# Altium PCB Labortápegység_v1.PcbDoc
Units mil, origin at the board's own origin, x right, y up, seen from the top; angles counter-clockwise.
Board outline 1968.5 x 1968.5 mil, 2 copper layers (Top Layer, Bottom Layer); 60 components, 36 nets, 167 pads, 21 vias.
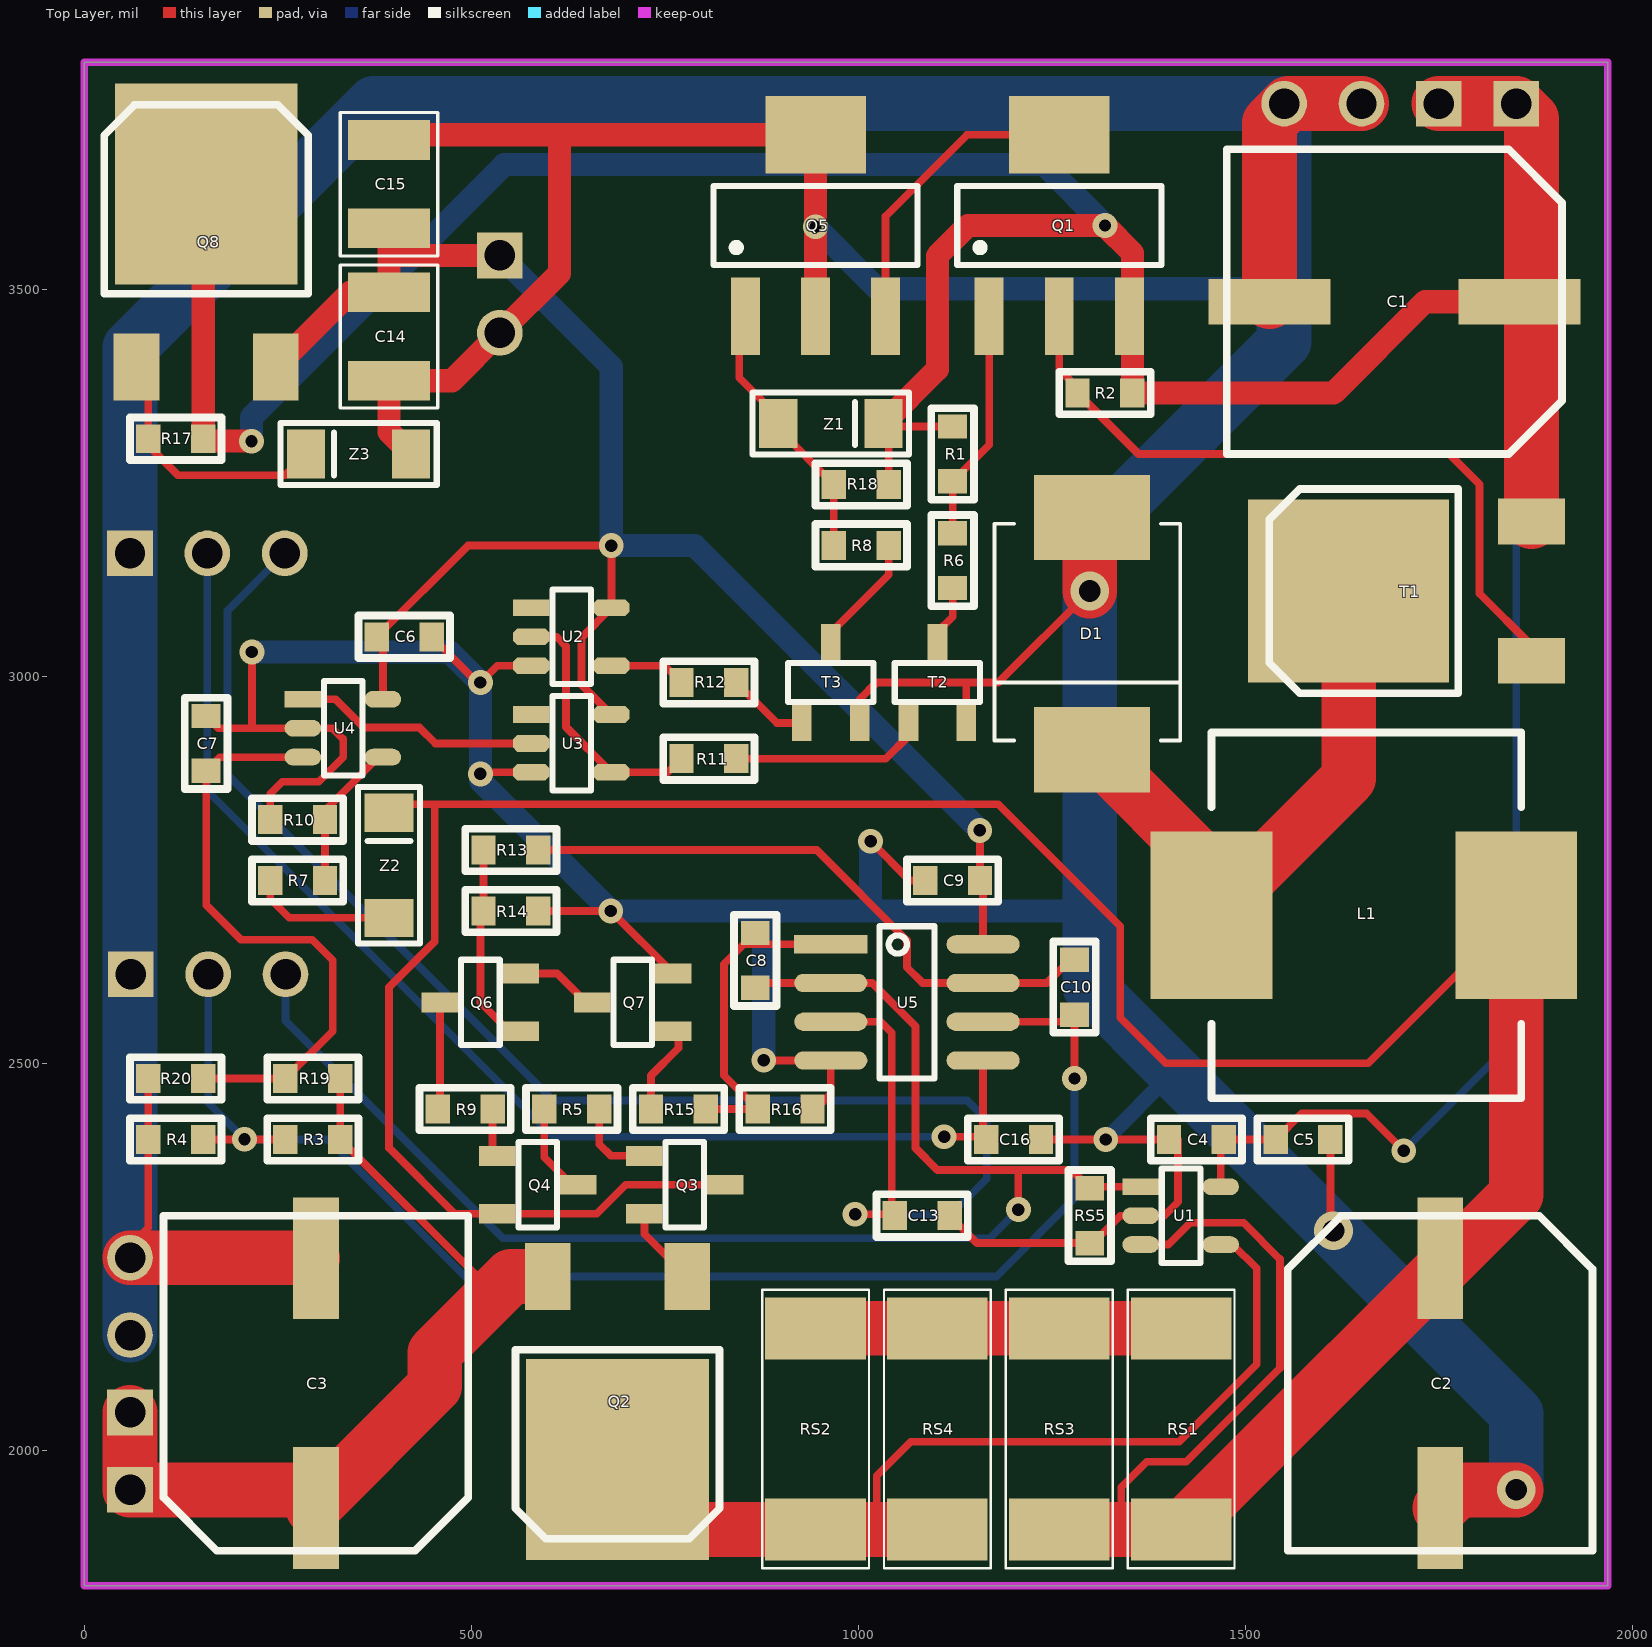
[diagram p0: Top Layer view]
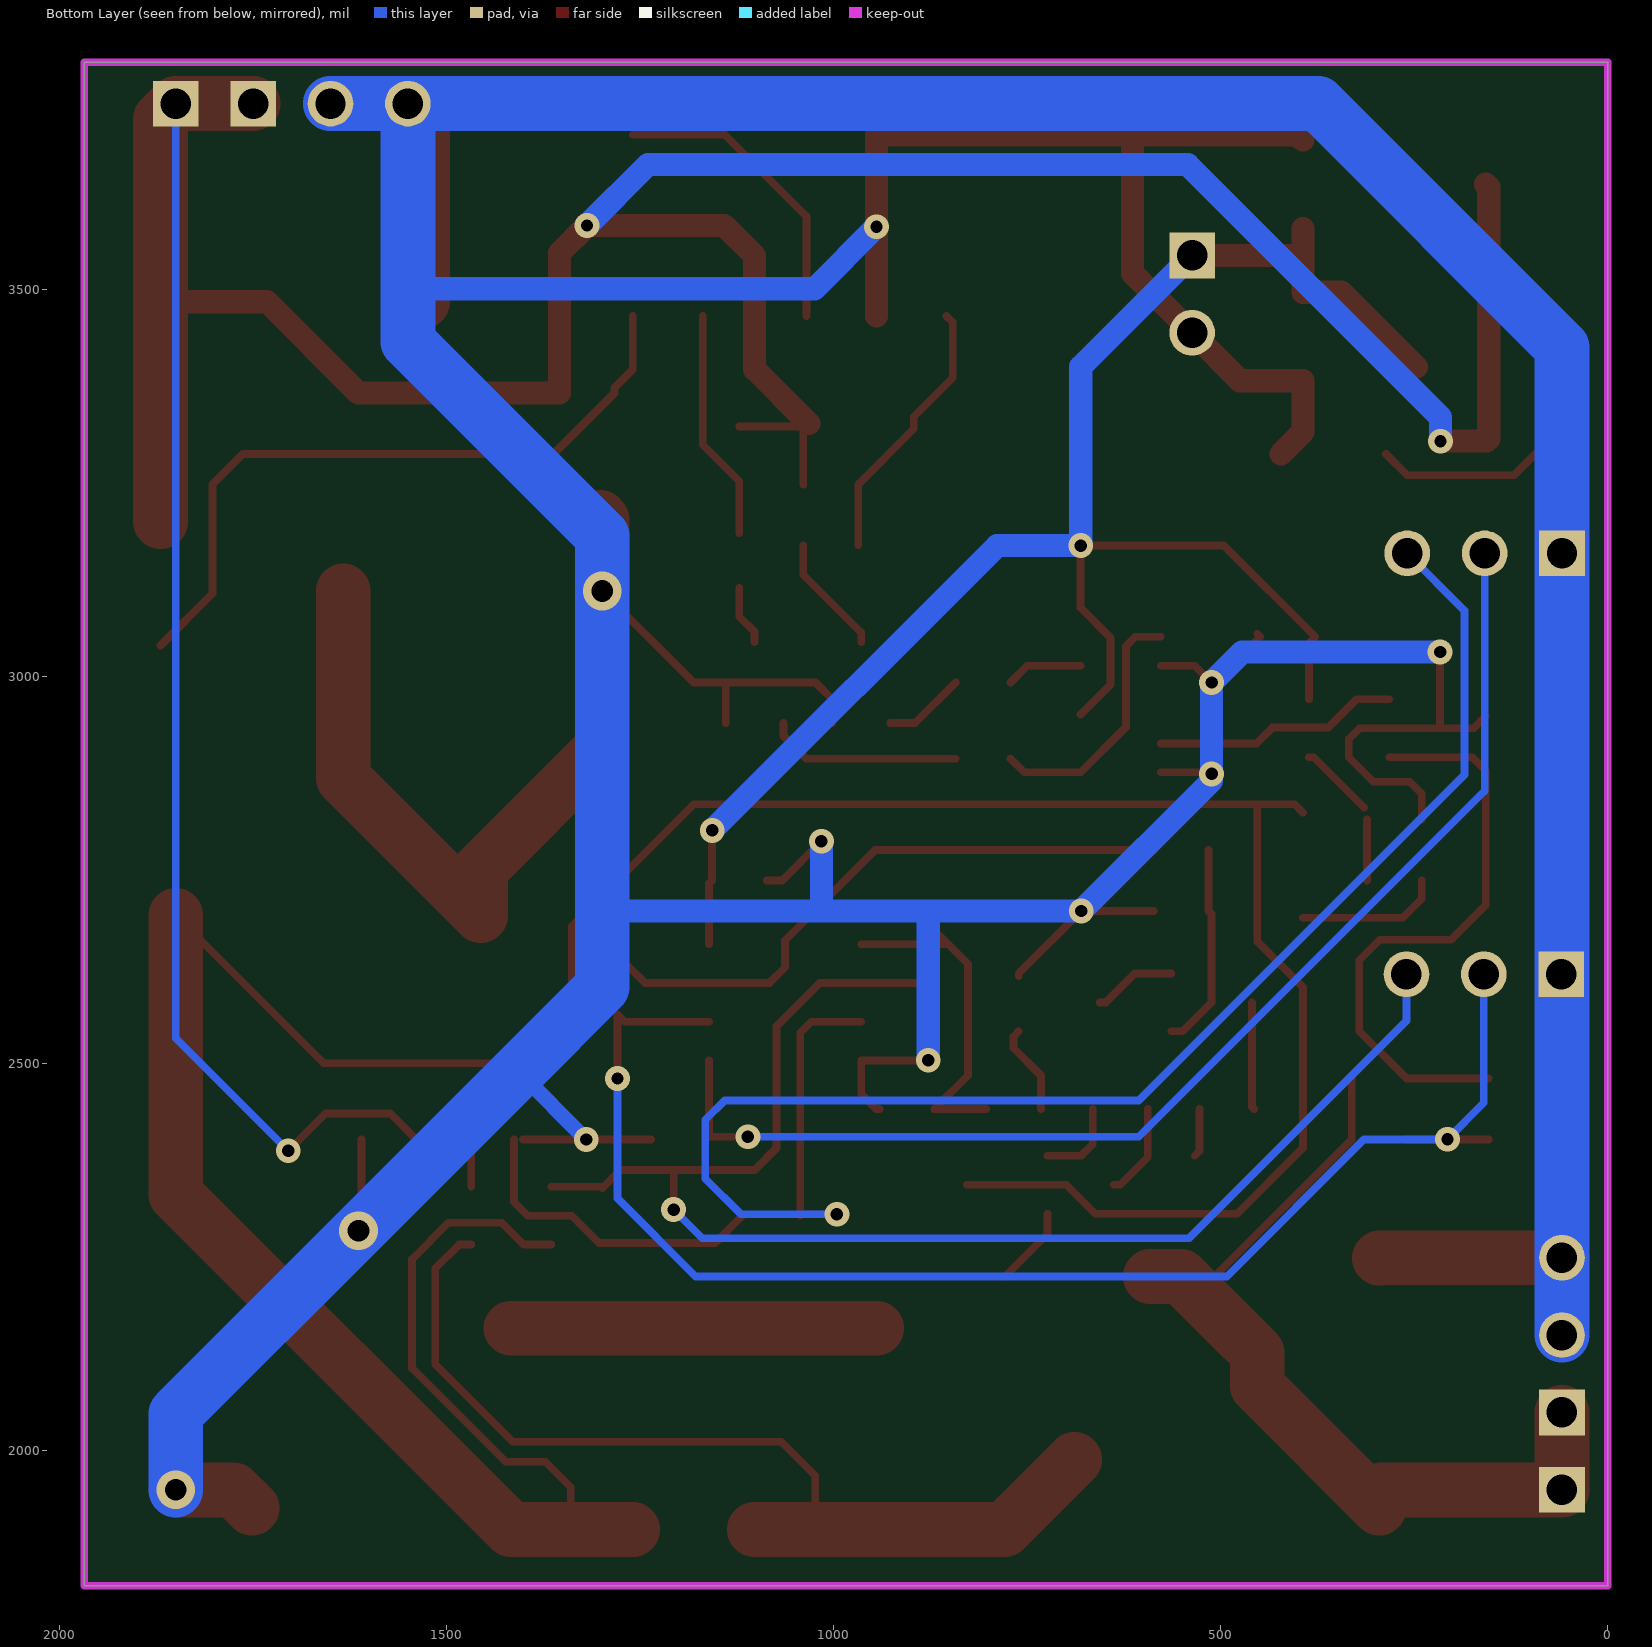
[diagram p1: Bottom Layer view, seen from below]
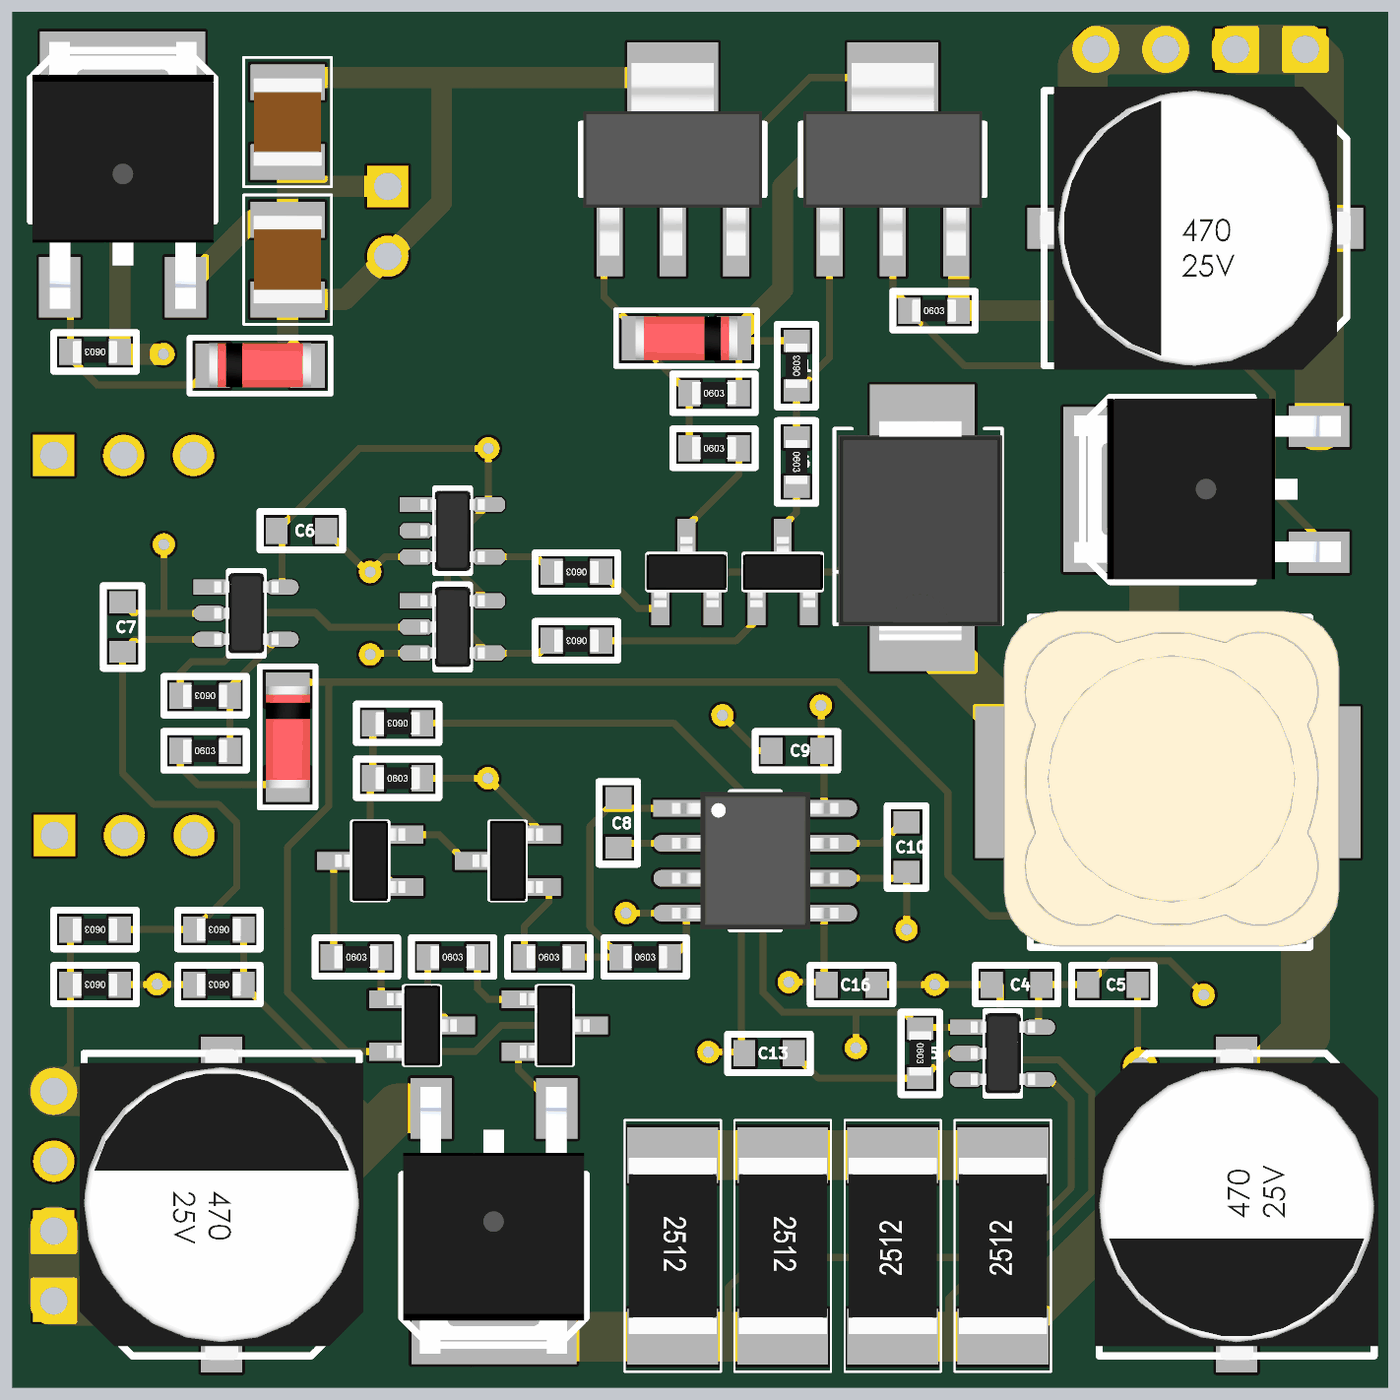
[diagram p2: 3D render of the assembled board from above, using the file's embedded part models]

## Layer stack, top to bottom
Top Layer: signal copper 1.4
Dielectric: dielectric 12.6, FR-4, Dk 4.8
Bottom Layer: signal copper 1.4

## Board outline
0,1825 1968.5,1825 1968.5,3793.5 0,3793.5

## Design rules (kind name [scope] priority, off if disabled: settings)
Clearance [All] p1: gap=10
PolygonConnect [All] p1: connectstyle=Relief reliefconductorwidth=10 reliefentries=4 polygonreliefangle="90 Angle"
RoutingVias [All] p1: holewidth=28 width=50 viastyle="Through Hole" minholewidth=16 minwidth=32 maxholewidth=28 maxwidth=50
SilkToSilkClearance [All] p1: silktosilkclearance=0
SilkscreenOverComponentPads [All] p1: minsilkscreentomaskgap=0
SolderMaskExpansion [All] p1: expansion=4
Width [All] p1: maxlimit=196.85 minlimit=10 preferedwidth=10
26 further rules are at their usual default settings.

## Components (designator, comment, footprint, x,y, rotation, side; value= is the part's Value field where it differs from the comment)
C1 "220uF 50V" CAP_ALU_ELKO_10D_10,5H 1692.91,3484.25 r180 top
C2 "220uF 50V" CAP_ALU_ELKO_10D_10,5H 1751.97,2086.61 r270 top
C3 "220uF 50V" CAP_ALU_ELKO_10D_10,5H 299.28,2086.61 r90 top
C4 "100nF" FP_0603_CAP_080 1437.01,2401.57 r0 top
C5 "1uF" FP_0603_CAP_080 1574.8,2401.57 r0 top
C6 "100nF" FP_0603_CAP_080 413.39,3051.18 r180 top
C7 "100nF" FP_0603_CAP_080 157.48,2913.39 r270 top
C8 "100nF" FP_0603_CAP_080 867,2633 r270 top
C9 "100nF" FP_0603_CAP_080 1122.05,2736.22 r0 top
C10 "470nF" FP_0603_CAP_080 1279.53,2598.43 r270 top
C13 "100nF" FP_0603_CAP_080 1082.68,2303.15 r180 top
C14 "22uF" FP_1210_CAP_N 393.7,3439.17 r90 top
C15 "22uF" FP_1210_CAP_N 393.7,3636.02 r270 top
C16 "100nF" FP_0603_CAP_080 1200.79,2401.57 r180 top
D1 "SS36" DIODE_SMC 1299.21,3051.18 r270 top
L1 "22uH" SRR1206_T 1653.54,2691.14 r0 top
Q1 "BCP53-16" TR_SOT223 1259.84,3582.68 r90 top
Q2 "MJD122G" TR_D-PAK 688.98,2106.3 r180 top
Q3 "MMBTA42LT1G" TR_SOT23 776,2343 r180 top
Q4 "MMBTA92LT1G" TR_SOT23 586,2343 r180 top
Q5 "BCP53-16" TR_SOT223 944.88,3582.68 r90 top
Q6 "MMBTA42LT1G" TR_SOT23 511.81,2578.74 r0 top
Q7 "MMBTA42LT1G" TR_SOT23 708.66,2578.74 r0 top
Q8 "MJD122G" TR_D-PAK 157.48,3517.91 r0 top
R1 "1K" FP_0603_RES 1122.05,3287.4 r90 top
R2 "1K" FP_0603_RES 1318.9,3366.14 r0 top
R3 "1K" FP_0603_RES 295.28,2401.57 r180 top
R4 "1K" FP_0603_RES 118.11,2401.57 r180 top
R5 "1K" FP_0603_RES 629.92,2440.94 r0 top
R6 "1K" FP_0603_RES 1122.05,3149.61 r270 top
R7 "1K" FP_0603_RES 275.59,2736.22 r0 top
R8 "1K" FP_0603_RES 1003.94,3169.29 r0 top
R9 "1K" FP_0603_RES 492.13,2440.94 r0 top
R10 "1K" FP_0603_RES 275.59,2814.96 r180 top
R11 "1K" FP_0603_RES 807.09,2893.7 r180 top
R12 "1K" FP_0603_RES 807.09,2992.13 r180 top
R13 "1K" FP_0603_RES 551.18,2775.59 r180 top
R14 "1K" FP_0603_RES 551.18,2696.85 r0 top
R15 "1K" FP_0603_RES 767.72,2440.94 r0 top
R16 "1K" FP_0603_RES 905.51,2440.94 r0 top
R17 "100K" FP_0603_RES 118.11,3307.09 r180 top
R18 "1K" FP_0603_RES 1003.94,3248.03 r0 top
R19 "1K" FP_0603_RES 295.28,2480.32 r180 top
R20 "1K" FP_0603_RES 118.11,2480.32 r180 top
RS1 "0.2R" FP_2512_RES 1417.32,2027.56 r90 top
RS2 "0.2R" FP_2512_RES 944.88,2027.56 r270 top
RS3 "0.2R" FP_2512_RES 1259.84,2027.56 r90 top
RS4 "0.2R" FP_2512_RES 1102.36,2027.56 r270 top
RS5 "20K" FP_0603_RES 1299.21,2303.15 r270 top
T1 "NTD20P06LG" FET_D-PAK 1751.97,3110.24 r90 top
T2 "PMBF170" FET_SOT23 1102.36,2992.13 r270 top
T3 "PMBF170" FET_SOT23 964.57,2992.13 r270 top
U1 "INA168" ANALOG_SOT23-5 1417.32,2303.15 r0 top
U2 "74AHC1G14" GATE_SOT23-5 629.92,3051.18 r0 top
U3 "74AHC1G14" GATE_SOT23-5 629.92,2913.39 r0 top
U4 "MCP6001T" ANALOG_SOT23-5 334.65,2933.07 r0 top
U5 "LM358" FP_SO8_MS012AA 1062.99,2578.74 r0 top
Z1 "18V" SOD-80 964.57,3326.77 r270 top
Z2 "3.6V" SOD-80 393.7,2755.91 r0 top
Z3 "5V1" SOD-80 354.33,3287.4 r90 top

## Footprints (in the part's own frame and the unit in brackets; to place one, negate y for a bottom-side part, rotate by r counter-clockwise, add the part's x,y. Pads: shape width x height; smd on the part's side, far side on the other; paste and mask are expansions set on the pad)
ANALOG_SOT23-5 [mm] "SOT23, 5-Leads, Body 2.9x1.6mm, Pitch 0.95mm, Lead Span 2.8mm, IPC Medium Density"
  rect 1.2x0.55 smd mask+0.05: 1(-1.327,0.95)
  oval 1.2x0.55 smd mask+0.05: 2(-1.327,0) 3(-1.327,-0.95) 4(1.3,-0.95) 5(1.3,0.95)
  silkscreen extent -0.64,-1.55 0.64,1.55, body extent -1.17,-1.46 1.17,1.46, height 1
CAP_ALU_ELKO_10D_10,5H [mm]
  rect 4x1.5 smd: N(4.1,0) P(-4.1,0)
  silkscreen extent -5.5,-5 5.5,5, body extent -5.65,-5.15 5.65,5.15, height 10.8
DIODE_SMC [mil]
  rect 110x150 smd: A(-154,3) K(146,3)
  silkscreen extent -146,-123 134,117, body extent -157,-117 157,117, height 91
FET_D-PAK [mm] "D-Pak (TO-252-AA)"
  rect 6x6.6 smd: D(0,3)
  rect 1.5x2.2 smd: G(-2.286,-3) S(2.286,-3)
  silkscreen extent -3.35,-0.6 3.35,5.6, body extent -3.28,-3.79 3.3,5.91, height 2.32
FET_SOT23 [mm] "SOT23-3 tok"
  rect 1.2x0.65 smd: D(-1.327,0) G(1.327,-0.95) S(1.327,0.95)
  silkscreen extent -0.64,-1.4 0.64,1.4, body extent -1.27,-1.46 1.27,1.46, height 0.97
FP_0603_CAP_080 [mm] "0.8mm magas 0603 kapacitás"
  rect 0.8x0.95 smd: 1(-0.9,0) 2(0.9,0)
  silkscreen extent -1.5,-0.7 1.5,0.7, body extent -0.8,-0.4 0.76,0.4, height 0.8
FP_0603_RES [mm] "0603 ellenállás"
  rect 0.8x0.95 smd: 1(-0.9,0) 2(0.9,0)
  silkscreen extent -1.5,-0.7 1.5,0.7, body extent -0.8,-0.4 0.8,0.4, height 0.44
FP_1210_CAP_N [mm] "Chip Capacitor, Body 3.2x2.5mm, IPC Medium Density"
  rect 1.3x2.7 smd: 1(-1.45,0) 2(1.45,0)
  silkscreen extent -2.35,-1.6 2.35,1.6, body extent -1.6,-1.25 1.6,1.25, height 2.5
FP_2512_RES [mm]
  rect 2.035x3.305 smd: 1(-3.302,0) 2(3.302,0)
  silkscreen extent -4.57,-1.75 4.57,1.75, body extent -3.2,-1.6 3.2,1.6, height 0.6
FP_SO8_MS012AA [mm] "SO8 JEDEC MS-012AA, Analog Devices R-8, SO8-SOT96-1, NS M08A"
  rect 2.4x0.6 smd: 1(-2.5,1.905)
  oval 2.4x0.6 smd: 2(-2.5,0.635) 3(-2.5,-0.635) 4(-2.5,-1.905) 5(2.5,-1.905) 6(2.5,-0.635) 7(2.5,0.635) 8(2.5,1.905)
  silkscreen extent -0.9,-2.5 0.9,2.5, body extent -3.03,-2.5 3.03,2.5, height 1.9
GATE_SOT23-5 [mm] "SOT23, 5-Leads, Body 2.9x1.6mm, Pitch 0.95mm, Lead Span 2.8mm, IPC Medium Density"
  rect 1.2x0.55 smd mask+0.05: 1(-1.327,0.95)
  oct 1.2x0.55 smd mask+0.05: 2(-1.327,0) 3(-1.327,-0.95) 4(1.3,-0.95) 5(1.3,0.95)
  silkscreen extent -0.64,-1.55 0.64,1.55, body extent -1.17,-1.46 1.17,1.46, height 1
SOD-80 [mm]
  rect 1.6x1.25 smd: A(0,-1.725) K(0,1.725)
  silkscreen extent -1.02,-2.57 1.02,2.57, body extent -0.79,-1.85 0.81,1.85, height 1.61
SRR1206_T [mm] "POWER INDUCTOR"
  rect 4x5.5 smd: 1(-5,0) 2(5,0)
  silkscreen extent -5,-6 5.16,6, body extent -5.97,-5.97 6.23,6.23, height 6
TR_D-PAK [mm] "D-Pak (TO-252-AA)"
  rect 1.5x2.2 smd: B(-2.286,-3) E(2.286,-3)
  rect 6x6.6 smd: C(0,3)
  silkscreen extent -3.35,-0.6 3.35,5.6, body extent -3.28,-3.79 3.3,5.91, height 2.32
TR_SOT23 [mm] "SOT23-3 tok"
  rect 1.2x0.65 smd: B(1.327,-0.95) C(-1.327,0) E(1.327,0.95)
  silkscreen extent -0.64,-1.4 0.64,1.4, body extent -1.27,-1.46 1.27,1.46, height 0.97
TR_SOT223 [mm] "SOT223 package, 3 leads"
  rect 2.55x0.95 smd: B(-2.975,2.3) C(-2.975,0) E(-2.975,-2.3)
  rect 2.55x3.3 smd: C(2.975,0)
  silkscreen extent -1.3,-3.35 1.3,3.35, body extent -3.5,-3.25 3.5,3.25, height 1.65

## Part data
C1 C2 C3: library part "Cap Pol1", "Polarized Capacitor (Radial)"
C4 C6 C7 C8 C9 C10 C13 C16: library part Cap, "Capacitor"
C5 C14 C15: library part CAP, "Capacitor"
D1: library part SCHOTTKY, "NXP - PMEG3020EJ,115 - SCHOTTKY RECT 30V 2A SOD323F"
L1: library part Inductor, "Inductor"
Q1 Q4 Q5: library part PNP, "PNP General-purpose Transistor"
Q2 Q3 Q6 Q7 Q8: library part NPN, "NPN General-purpose Transistor"
R1 R2 R3 R4 R5 R6 R7 R8 R9 R10 R11 R12 R13 R14 R15 R16 R18 R19 R20: library part RES, "Resistor"
R17 RS1 RS2 RS3 RS4 RS5: library part Res3, "Resistor"
T1: library part PMOS
T2 T3: library part NMOS
U2 U3: "SCHMITT-TRIGGER INVERTER"
U4: library part MCP6001
U5: "Low power dual operational amplifiers"
Z1 Z2 Z3: library part ZENER, "Zener Diode"

## Free pads (board coordinates)
  rect 59.06x59.06 hole 39.37: 0(59,3159) 0(59.06,1948.82) 0(59.06,2048.82) 0(60,2615) 0(537,3544) 0(1750.39,3740.16) 0(1850.39,3740.16)
  round 59.06 hole 39.37: 0(59.06,2148.82) 0(59.06,2248.82) 0(159,3159) 0(160,2615) 0(259,3159) 0(260,2615) 0(537,3444) 0(1550.39,3740.16) 0(1650.39,3740.16)

## Via types
v1: diameter 32, hole 16, Top Layer to Bottom Layer, 18 vias
v2: diameter 50, hole 28, Top Layer to Bottom Layer, 3 vias

## Nets (pads, with @x,y where several pads share a name; then routed paths per layer and width w, separated by ;. In a path a pad name is that pad's centre, name@x,y a point inside that pad or via, vN(x,y) a via of type N, cw(c..) or ccw(c..) an arc to the next point about the centre after c; other vN are vias at no path point)
5V1: C6.2 C9.2 C14.2 C15.2 pad.0@537,3544 Q8.E U2.5 U3.5 U4.5 U5.8 | length 2312.7
  Top Layer w10: U4.5 385.83,3043.31 C6.2 495.77,3169 v1(681,3169) ; U3.5 642.48,2989.41 642.48,3049.96 U2.5 v1@681.1,3168.9 ; v1(1157,2801) 1157.48,2800.52 C9.2 1161.42,2732.28 U5.8
  Top Layer w30: Q8.E 343.94,3496.26 C14.2 393.7,3550 ; C15.2 393.7,3550 ; pad.0@537,3544 399.7,3544 393.7,3550
  Bottom Layer w30: pad.0@537,3544 681,3400 v1(681,3169) 789,3169 v1(1157,2801)
CURRENT_0-3V: C13.2 pad.0@259,3159 U5.3 | length 2116.4
  Top Layer w10: U5.3 1028.94,2553.74 1043.31,2539.37 1043.31,2303.15 1041.46,2305 v1(996,2305)
  Bottom Layer w10: pad.0@259,3159 185,3085 185,2873 606,2452 1141,2452 1166,2427 1166,2351 1120,2305 v1(996,2305)
GND: C1.N C2.N C3.N C4.1 C5.2 C6.1 C7.1 C9.1 C13.1 C14.1 C15.1 C16.1 D1.A pad.0@59,3159 pad.0@59.06,2148.82 pad.0@59.06,2248.82 pad.0@60,2615 pad.0@537,3444 pad.0@1550.39,3740.16 pad.0@1650.39,3740.16 Q5.C Q7.E R4.2 R10.2 R14.2 R16.2 R20.2 RS5.2 T2.S T3.S U1.2 U2.3 U3.3 U4.2 U5.4 Z3.A | length 12170.8
  Top Layer w10: pad.0@41.14,2262.01 39.37,2263.78 59.06,2263.78 82.68,2287.4 R4.2 R20.2 ; C7.1 173.23,2933.07 216.54,2933.07 ; v1(216.54,3031.5) 216.54,2933.07 ; R10.2 240.16,2848.16 256,2864 303,2864 334.65,2895.65 334.65,2919 320.57,2933.07 U4.2 216.54,2933.07 ; C6.1@452.76,3055.12 C6.1 507.87,2992.13 v1(511.81,2992.13) 533.46,3013.78 U2.3 ; v1(511.81,2874.02) 513.78,2875.98 U3.3 ; R14.2 v1(680.2,2696.85) Q7.E Q7.E@760.91,2612.57 ; v1(878,2504) 878,2509 883.26,2503.74 U5.4 964.57,2460.53 944.98,2440.94 R16.2 ; T3.S 1001.97,2970.47 1023.62,2992.13 1181.1,2992.13 v2(1299.21,3110.24) ; v1(1016,2787) 1066.78,2736.22 C9.1 ; C13.1 1153.54,2267.72 RS5.2 1303.15,2267.72 1338.58,2303.15 U1.2 1395.54,2303.15 1413.39,2321 C4.1@1413.39,2401.57 ; T2.S 1139.76,2988 ; C16.1 v1(1320,2401.57) C4.1 ; C5.2 1610.24,2287.4 v2(1614.17,2283.46)
  Top Layer w30: C15.1 400.39,3699.8 614,3699.8 ; Z3.A 393.7,3315.94 C14.1 475.09,3382.09 537,3444 614,3521 614,3699.8 ; Q5.C@944.88,3465.55 v1(944.88,3581) 944.88,3699.8 614,3699.8
  Top Layer w70.87: pad.0@59.06,2248.82 294.49,2248.82 C3.N@295.28,2248.03 ; v2(1299.21,3110.24) 1299.21,3202.18 D1.A ; C1.N 1531.5,3715.5 1556.16,3740.16 pad.0@1650.39,3740.16 ; C2.N 1775.59,1948.82 v2(1850.39,1948.82)
  Bottom Layer w10: 1020.5,2700.35 1024,2696.85 ; 1274,2696.85 1292.36,2696.85 1299.21,2690
  Bottom Layer w20: v1(1320,2401.57) 1406.32,2487.89 1406.32,2491.32
  Bottom Layer w30: v1(216.54,3031.5) 472.44,3031.5 v1(511.81,2992.13) v1(511.81,2874.02) 511.81,2865.24 v1(680.2,2696.85) 884,2696.85 ; v1(878,2504) 878,2690.85 884,2696.85 ; v1(944.88,3581) 1024.88,3501 1550.39,3501 ; v1(1016,2787) 1016,2704.85 1020.5,2700.35 ; 1274,2696.85 1024,2696.85 884,2696.85
  Bottom Layer w70.87: pad.0@59.06,2148.82 59.06,2248.82 59.06,3425.2 374.02,3740.16 pad.0@1550.39,3740.16 ; pad.0@1650.39,3740.16 pad.0@1550.39,3740.16 ; v2(1850.39,1948.82) 1850.39,2047.24 v2(1614.17,2283.46) 1406.32,2491.32 1299.21,2598.43 1299.21,2690 v2(1299.21,3110.24) 1299.21,3181.21 1550.39,3432.39 1550.39,3501 pad.0@1550.39,3740.16
I_MEASURE: C8.2 pad.0@260,2615 RS5.1 U1.1 U5.2 | length 1891.8
  Top Layer w10: C8.2@867.52,2603.74 U5.2 1018.31,2603.74 1074,2548.05 1074,2390.57 1102.36,2362.2 1207,2362.2 ; v1(1207,2311) 1206,2311 1207,2312 1207,2362.2 ; U1.1 1301.18,2340.55 RS5.1 1275.59,2362.2 1207,2362.2
  Bottom Layer w10: pad.0@260,2615 260,2555 541,2274 1170,2274 v1(1207,2311)
NetC8_1: C8.1 R15.2 R16.1 U5.1 | length 441.5
  Top Layer w10: R15.2 R16.1 826.46,2484.57 826.46,2627.89 C8.1@852.31,2653.74 ; C8.1 C8.1@852.31,2653.74 ; U5.1 C8.1@852.31,2653.74
NetC10_1: C10.1 R13.1 U5.7 | length 784.3
  Top Layer w10: R13.1 946.41,2775.59 1062.99,2659.01 1062.99,2624.01 1083.26,2603.74 U5.7 1243.74,2603.74 C10.1@1268.82,2628.82
NetD1_K: D1.K L1.1 T1.D | length 770.5
  Top Layer w70.87: D1.K 1456.69,2750.7 L1.1 1633.86,2868.31 T1.D
NetQ1_B: Q1.B R1.1 R6.1 | length 300.1
  Top Layer w10: R6.1 R1.1 1169.29,3299.21 Q1.B
NetQ1_C: Q1.C Q5.E R2.1 T1.G | length 1310.5
  Top Layer w10: Q5.E 1035.43,3594.49 1140.75,3699.8 Q1.C@1259.84,3699.8 ; Q1.C@1259.84,3465.55 1259.84,3396.62 1283.46,3373 R2.1 1362.2,3287.4 1763.6,3287.4 1803,3248 1803,3107 T1.G@1870.08,3039.92
NetQ2_B: Q2.B Q3.E | length 104.1
  Top Layer w10: Q3.E 723.76,2279.63 Q2.B
NetQ2_C: Q2.C RS2.2 RS4.2 U1.4 | length 1374.3
  Top Layer w10: Q2.C@669.29,1982.48 Q2.C@754.21,1897.56 ; 1024,1897.56 1024,1967 1068,2011 1415,2011 1515,2111 1515,2235 1484.25,2265.75 U1.4
  Top Layer w70.87: Q2.C 779.61,1897.56 RS2.2 1024,1897.56 RS4.2
NetQ3_B: Q3.B R5.2 | length 110
  Top Layer w10: R5.2 665.35,2395.65 680.6,2380.4 Q3.B
NetQ4_B: Q4.B R9.2 | length 63.1
  Top Layer w10: R9.2 527.56,2386.6 Q4.B
NetQ4_C: Q4.C R5.1 | length 120.9
  Top Layer w10: R5.1 594.49,2378.51 630,2343 Q4.C
NetQ5_B: Q5.B R8.1 R18.1 Z1.A | length 350.1
  Top Layer w10: Q5.B 846.46,3457.68 846.46,3385.83 896.65,3335.63 Z1.A 896.65,3319.88 R18.1 R8.1
NetQ6_B: Q6.B R13.2 R14.1 | length 266.2
  Top Layer w10: R13.2 R14.1 511.81,2692.91 511.81,2578.74 549.21,2541.34 Q6.B
NetQ6_C: Q6.C R9.1 | length 139
  Top Layer w10: R9.1 459.57,2443.82 Q6.C
NetQ6_E: Q6.E Q7.C | length 107.9
  Top Layer w10: Q6.E 610.86,2616.14 648.26,2578.74 Q7.C
NetQ7_B: Q7.B R15.1 | length 118.8
  Top Layer w10: R15.1 732.28,2484.25 767.72,2519.68 767.72,2534.53 Q7.B Q7.B@761.81,2541.34
NetQ8_B: Q8.B R17.2 Z3.K | length 338.7
  Top Layer w10: Q8.B 82.68,3384.61 R17.2 82.68,3298.32 121,3260 259.02,3260 Z3.K
NetR6_2: R6.2 T2.D | length 78
  Top Layer w10: T2.D 1102.36,3057.36 1122.05,3077.05 R6.2
NetR7_1: R7.1 Z2.A | length 187.4
  Top Layer w10: R7.1 240.16,2712.6 264.76,2687.99 Z2.A
NetR7_2: R7.2 R10.1 U4.4 | length 176.5
  Top Layer w10: R7.2 R10.1 ; R10.1@314.96,2830.71 379.92,2895.67 U4.4
NetR8_2: R8.2 T3.D | length 155.9
  Top Layer w10: T3.D 964.57,3056.57 1039.37,3131.37 R8.2
NetR11_1: R11.1 T2.G | length 251.5
  Top Layer w10: R11.1 1035.7,2893.7 1064.96,2922.96 T2.G
NetR11_2: R11.2 U2.2 U3.4 | length 335
  Top Layer w10: U2.2 610.24,3051.18 622.48,3038.94 622.48,2934.61 U3.4 753.94,2875.98 R11.2
NetR12_1: R12.1 T3.G | length 106.3
  Top Layer w10: R12.1 894.76,2939.88 T3.G
NetR12_2: R12.2 U2.4 | length 99.5
  Top Layer w10: U2.4 750,3013.78 R12.2
NetRS1_2: RS1.2 RS2.1 RS3.2 RS4.1 | length 492.1
  Top Layer w10: RS2.1@925.2,2157.56 RS2.1
  Top Layer w70.87: RS2.1 RS4.1 RS3.2 RS1.2
NetU3_2: U3.2 U4.1 | length 318.9
  Top Layer w10: U4.1 324.53,2970.47 361,2934 433,2934 453.61,2913.39 U3.2
OUTPUT: C3.P pad.0@59.06,1948.82 pad.0@59.06,2048.82 Q2.E R3.1 R19.1 | length 1106.9
  Top Layer w10: R19.1 R3.1 507.64,2224.64
  Top Layer w70.87: pad.0@59.06,2048.82 59.06,1948.82 C3.P@292,1948.82 ; C3.P@295.28,1925.2 452.76,2082.68 452.76,2125.98 486.89,2160.11 551.18,2224.41 Q2.E@591,2224.41
PWM_SUPPLY_CONTROL: C7.2 R19.2 R20.1 U4.3 | length 783.2
  Top Layer w10: R20.1 R19.2 321,2541.47 321,2633 294.47,2659.53 202.47,2659.53 157.48,2704.52 C7.2 175.2,2895.67 U4.3
PWM_SUPPLY_OUTPUT: C2.P L1.2 Q3.C Q4.E RS1.1 RS3.1 U1.3 Z2.K | length 4527.3
  Top Layer w10: Z2.K 404.53,2834.65 452.76,2834.65 ; Q3.C 699.48,2343 662.08,2305.6 Q4.E 478.77,2305.6 393.7,2390.67 393.7,2598.43 452.76,2657.48 452.76,2834.65 ; RS3.1@1240.16,1897.56 RS3.1 ; 1340,1897.56 1340,1952 1373,1985 1424,1985 1545,2106 1545,2247 1498,2294 1429,2294 1400.75,2265.75 U1.3 ; L1.2 1659.25,2500 1397.64,2500 1338.58,2559.06 1338.58,2677.17 1181.1,2834.65 452.76,2834.65
  Top Layer w70.87: RS3.1 1340,1897.56 RS1.1 1850.39,2330.63 L1.2
V_INPUT: C1.P C4.2 C5.1 pad.0@1750.39,3740.16 pad.0@1850.39,3740.16 Q1.E Q8.C R1.2 R2.2 R17.1 R18.2 T1.S U1.5 Z1.K | length 5638.9
  Top Layer w10: Z1.K Z1.K@1036.42,3322.83 ; R18.2 1039.37,3319.88 Z1.K@1036.42,3322.83 ; R1.2 Z1.K@1036.42,3322.83 ; Q1.E 1350.39,3370.08 R2.2 ; U1.5 1468.5,2389.76 C4.2@1480.31,2401.57 ; C4.2 C4.2@1480.31,2401.57 ; v1(1705,2387) 1656.72,2435.28 1573.07,2435.28 C5.1 C4.2@1480.31,2401.57 ; 1854.33,3557.28 1870.08,3541.54
  Top Layer w30: Q8.C 153.54,3632.09 R17.1 156.63,3304 v1(216,3304) ; Z1.K 1102.36,3396.65 1102.36,3543.31 1141.73,3582.68 v1(1318.9,3582.68) 1354.33,3547.24 R2.2 1614.17,3366.14 1732.28,3484.25 C1.P
  Top Layer w70.87: pad.0@1750.39,3740.16 1850.39,3740.16 1870.08,3720.47 1870.08,3541.54 T1.S
  Bottom Layer w10: v1(1705,2387) 1850.39,2532.39 pad.0@1850.39,3740.16
  Bottom Layer w30: v1(216,3304) 216,3335 542.42,3661.42 1240.16,3661.42 v1(1318.9,3582.68)
V_MEASURE: C10.2 pad.0@160,2615 R3.2 R4.1 U5.6 | length 1896.1
  Top Layer w10: R4.1 R3.2 ; U5.6 1270.28,2553.74 C10.2 v1(1279.53,2480.32)
  Bottom Layer w10: pad.0@160,2615 160,2449 v1(207,2402) ; v1@196.85,2401.57 314.96,2401.57 492.13,2224.41 1178.41,2224.41 1279.53,2325.53 v1(1279.53,2480.32)
VOLTAGE_0-3V: C16.2 pad.0@159,3159 U5.5 | length 1598.7
  Top Layer w10: v1(1111,2405) C16.2@1161.42,2405 ; U5.5 C16.2@1161.42,2405 ; C16.2 1161.93,2405 C16.2@1161.42,2405
  Bottom Layer w10: pad.0@159,3159 159,2852 606,2405 v1(1111,2405)
pads on no net: U2.1 U3.1

## Keep-outs
Keep-Out Layer:
  the board outline again, w10